# Altium PCB STM32Ethernet.PcbDoc
Units mm, origin at the board's own origin, x right, y up, seen from the top; angles counter-clockwise.
Board outline 45 x 65 mm, 2 copper layers (Top Layer, Bottom Layer), stack 1.646 mm thick; 65 components, 62 nets, 409 pads, 87 vias.
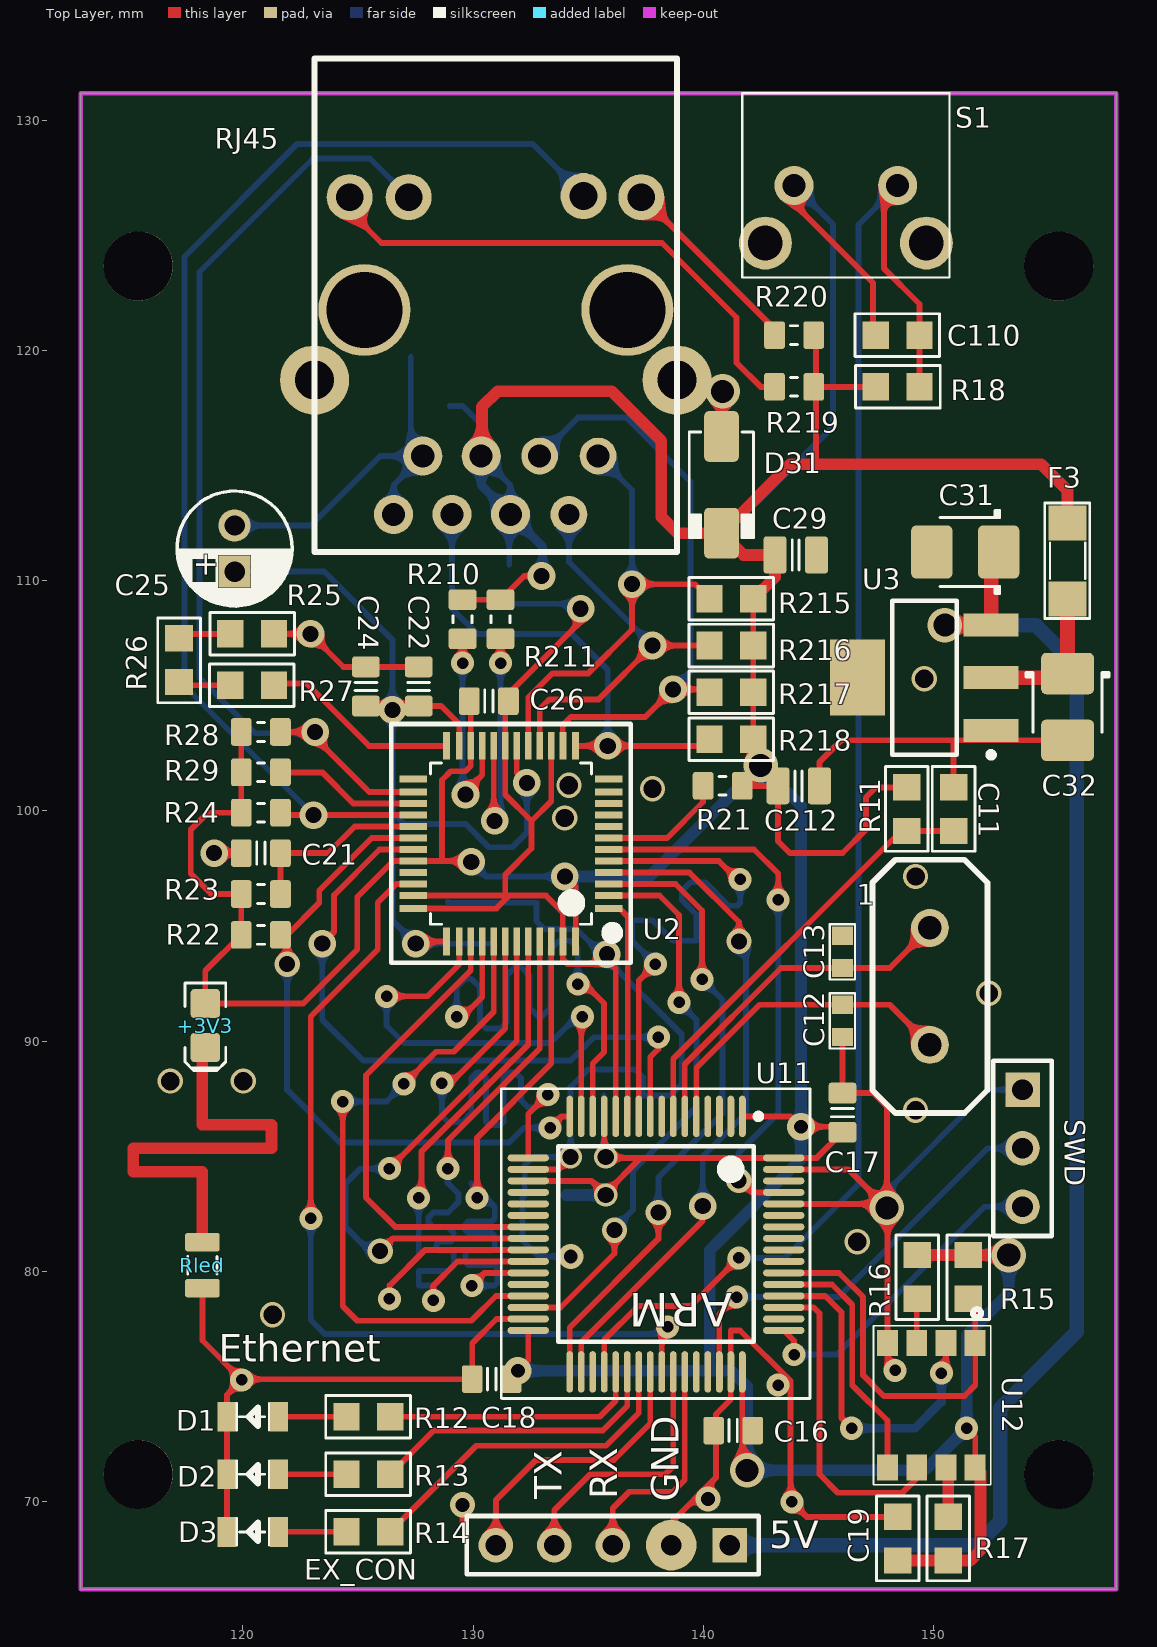
[diagram p0: Top Layer view]
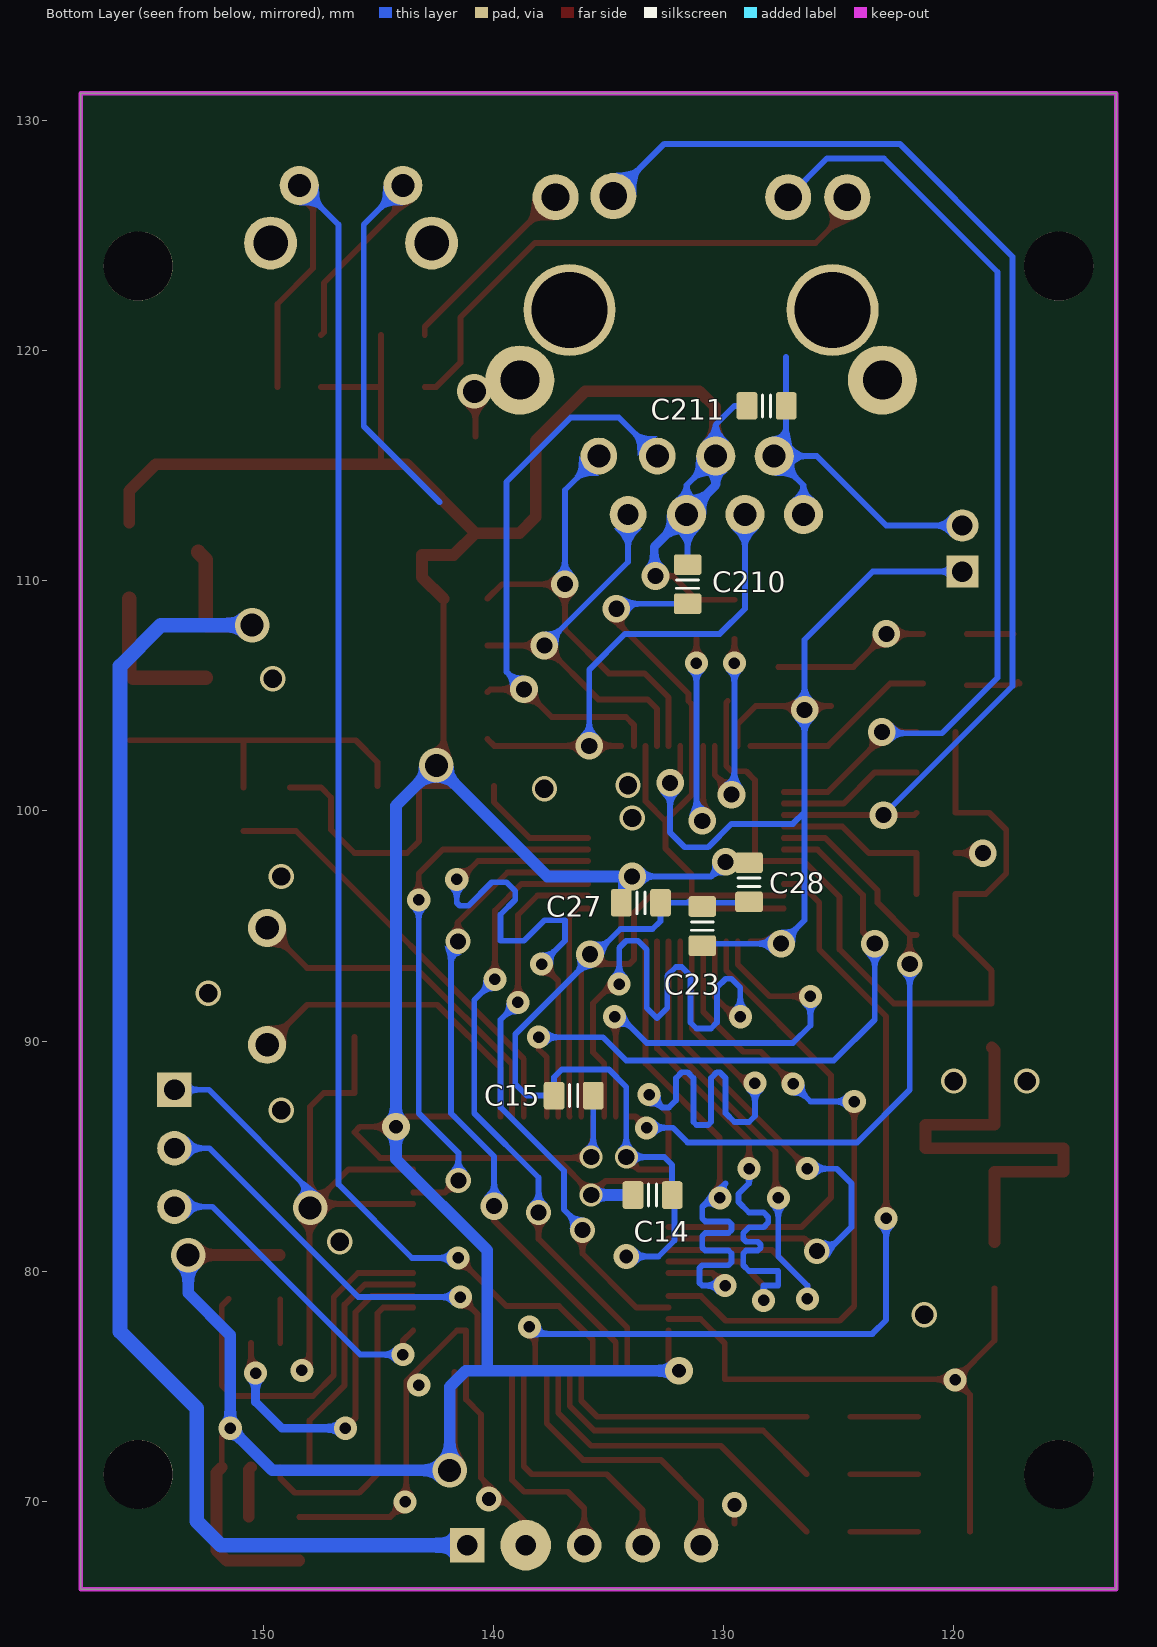
[diagram p1: Bottom Layer view, seen from below]
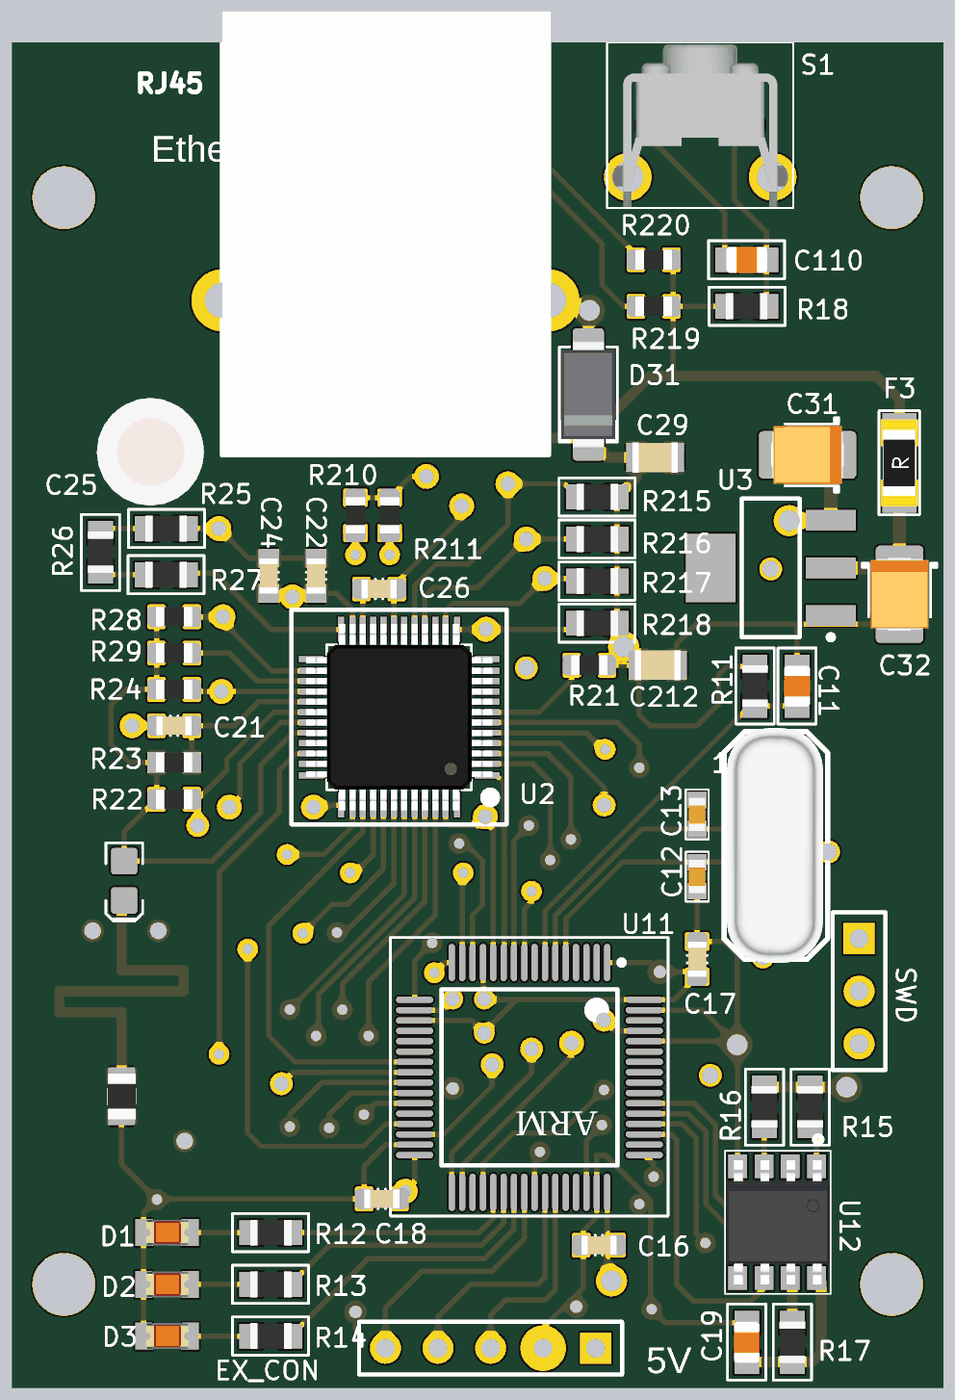
[diagram p2: 3D render of the assembled board from above, using the file's embedded part models]
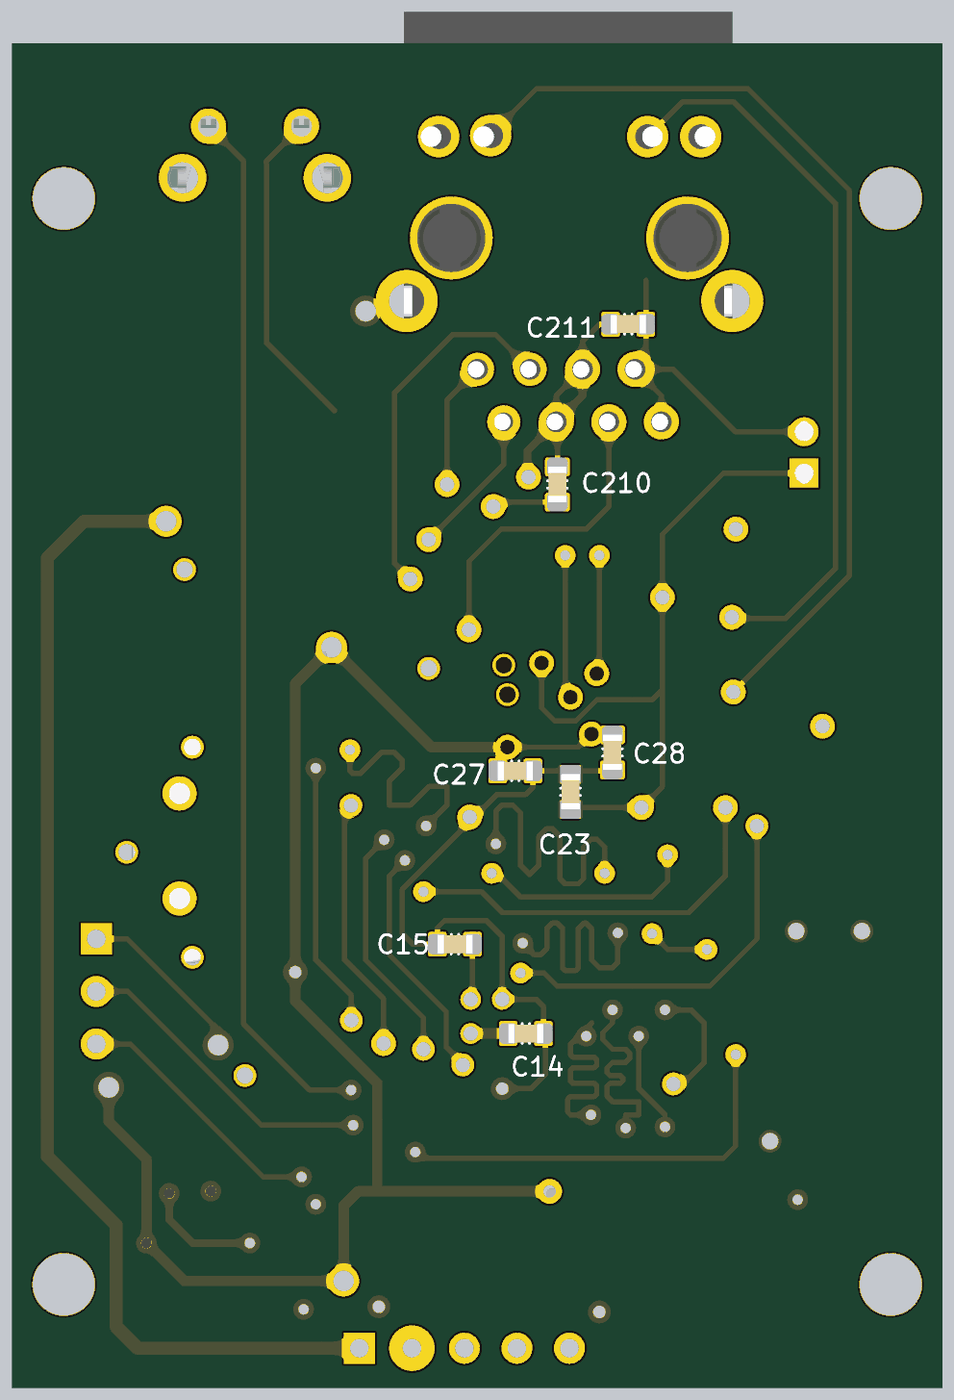
[diagram p3: 3D render of the assembled board from below, using the file's embedded part models]

## Layer stack, top to bottom
Top Solder: solder mask 0.0102, Solder Resist, Dk 3.5
Top Layer: signal copper 0.0356
Dielectric 1: dielectric 1.5748, FR-4, Dk 4.8
Bottom Layer: signal copper 0.0356
Bottom Solder: solder mask 0.0102, Solder Resist, Dk 3.5

## Board outline
112.947,66.179 112.947,131.179 157.947,131.179 157.947,66.179

## Design rules (kind name [scope] priority, off if disabled: settings)
Clearance [All] p1: gap=0.254
Length [InNetClass('ETH_SIGN')] p1: maxlimit=33 minlimit=27
PlaneConnect [All] p1: planeconnectstyle=Relief reliefexpansion=0.508 reliefentries=4 reliefconductorwidth=0.635 reliefairgap=0.254
PolygonConnect PAD_GND [(InPadClass('All Pads') AND InNet('GND'))] p1: connectstyle=Relief reliefconductorwidth=0.635 reliefentries=4 polygonreliefangle="90 Angle" airgapwidth=0.254
PolygonConnect [All] p2: connectstyle=Direct reliefconductorwidth=0.254 reliefentries=4 polygonreliefangle="90 Angle" airgapwidth=0.254
RoutingVias [All] p1: holewidth=0.7 width=1.2 viastyle="Through Hole" minholewidth=0.5 minwidth=1 maxholewidth=5 maxwidth=5
SolderMaskExpansion [All] p1: expansion=0.102
Width [All] p1: maxlimit=2.54 minlimit=0.254 preferedwidth=0.254
29 further rules are at their usual default settings.

## Classes and differential pairs
net class ETH_SIGN: MII_COL MII_CRS_WKUP MII_MDC MII_MDIO MII_RX_ER MII_RXD0 MII_RXD1 MII_RXD2 MII_RXD3 MII_TX_CLK MII_TX_EN MII_TXD0 MII_TXD1 MII_TXD2 MII_TXD3
net class SPI_DATA: STM_SPI_MISO STM_SPI_MOSI STM_SPI_SCK

## Components (designator, comment, footprint, x,y, rotation, side; value= is the part's Value field where it differs from the comment)
1 "CRY_25MHZ" cry 149.847,92.379 r270 top
+3V3 "Blue" LED-0805-K 118.364,90.678 r270 top
C11 "CAP_102_0603" CAP_0805_TOP 150.876,100.076 r90 top
C12 "CAP_18pF_0603" CAP_0603_TOP 146.047,90.879 r270 top
C13 "CAP_18pF_0603" CAP_0603_TOP 146.047,93.879 r90 top
C14 "CAP_104_0603" CAPC1608N_F#1 133.096,83.312 r180 bottom
C15 "CAP_104_0603" CAPC1608N_F#1 136.525,87.63 r0 bottom
C16 "CAP_104_0603" CAPC1608N_F#2 141.3,73.076 r180 top
C17 "CAP_104_0603" CAPC1608N_F#2 146.05,86.893 r90 top
C18 "CAP_104_0603" CAPC1608N_F#2 130.81,75.311 r180 top
C19 "CAP_104_0603" CAP_0805_TOP 148.447,68.379 r90 top
C21 "CAP_102_0603" CAPC1608N_F#2 120.777,98.171 r0 top
C22 "CAP_104_0603" CAPC1608N_F#3 127.635,105.41 r270 top
C23 "CAP_104_0603" CAPC1608N_F#4 130.937,94.996 r270 bottom
C24 "CAP_104_0603" CAPC1608N_F#3 125.343,105.41 r270 top
C25 "CAP_10uF/35V" CAP_10uF/35V 119.634,111.379 r90 top
C26 "CAP_104_0603" CAPC1608N_F#2 130.683,104.775 r180 top
C27 "CAP_104_0603" CAPC1608N_F#1 133.604,96.012 r180 bottom
C28 "CAP_104_0603" CAPC1608N_F#1 128.905,96.901 r90 bottom
C29 "CAP_104_0603" CAPC2012N_F 144.018,111.125 r0 top
C31 "330uF/25V" CAPMP3528X210N 151.384,111.252 r180 top
C32 "330uF/25V" CAPMP3528X210N 155.829,104.521 r270 top
C110 "CAP_102_0603" CAP_0805_TOP 148.447,120.679 r180 top
C210 "105" CAPC1608N_F#1 131.572,109.855 r270 bottom
C211 "105" CAPC1608N_F#1 128.143,117.602 r180 bottom
C212 "105" CAPC2012N_F 144.145,101.092 r0 top
D1 "LED_RED_0805" "LED 0805 TOP" 120.447,73.679 r0 top
D2 "LED_BLUE_0805" "LED 0805 TOP" 120.447,71.179 r0 top
D3 "LED_GREEN_0805" "LED 0805 TOP" 120.447,68.679 r0 top
D31 "Diode" DO-214AC 140.792,114.173 r270 top
EX_CON "EX_CON" HDR1X5 141.148,68.097 r180 top
F3 "fuse_200mA_1206" "SMD 1206" 155.829,110.871 r90 top
R11 "Res_4.7K_0805" RES_0805_TOP 148.844,100.076 r90 top
R12 "Res_330R_0805" RES_0805_TOP 125.447,73.679 r180 top
R13 "Res_330R_0805" RES_0805_TOP 125.447,71.179 r180 top
R14 "Res_330R_0805" RES_0805_TOP 125.447,68.679 r180 top
R15 "Res_4.7K_0805" RES_0805_TOP 151.511,79.756 r270 top
R16 "Res_4.7K_0805" RES_0805_TOP 149.301,79.756 r270 top
R17 "Res_4.7K_0805" RES_0805_TOP 150.647,68.379 r90 top
R18 "Res_4.7K_0805" RES_0805_TOP 148.447,118.429 r0 top
R21 "Res_2.2K_0805" RESC1608N_F#1 140.843,101.092 r0 top
R22 "Res_1.5K_0805" RESC1608N_F#1 120.777,94.615 r0 top
R23 "Res_4.7K_0805" RESC1608N_F#2 120.777,96.393 r180 top
R24 "Res_2.2K_0805" RESC1608N_F#1 120.777,99.925 r180 top
R25 "Res_47R_0805" RES_0805_TOP 120.396,107.696 r0 top
R26 "Res_120R_0805" RES_0805_TOP 117.221,106.553 r270 top
R27 "Res_4.7K_0805" RES_0805_TOP 120.396,105.465 r180 top
R28 "Res_0R_0603" RESC1608N_F#1 120.777,103.434 r0 top
R29 "Res_0R_0603" RESC1608N_F#1 120.777,101.68 r180 top
R210 "2k2" RESC1608N_F#1 129.54,108.331 r90 top
R211 "2k2" RESC1608N_F#1 131.191,108.331 r90 top
R215 "Res_49.9R_0805" RES_0805_TOP 141.224,109.22 r180 top
R216 "Res_49.9R_0805" RES_0805_TOP 141.224,107.188 r180 top
R217 "Res_49.9R_0805" RES_0805_TOP 141.224,105.156 r180 top
R218 "Res_49.9R_0805" RES_0805_TOP 141.224,103.124 r180 top
R219 "220R" RESC1608N_F#1 143.947,118.429 r180 top
R220 "220R" RESC1608N_F#1 143.947,120.679 r180 top
RJ45 "HR911105A" HR911105A 123.063,110.998 r0 top
Rled "Res_0805_1k" RESC2012N_F 118.237,80.264 r270 top
S1 "BUTTON 2P" "Nut nhan 2 chan  dung" 146.447,127.179 r0 top
SWD "Header 3" HDR1X3 153.873,87.884 r270 top
U2 "DP83848CVV" LQFP48 131.647,98.579 r180 top locked
U3 "AS1117-3V3" SOT223-4N 149.606,105.791 r180 top
U11 "STM32F107" LQFP64_N 137.947,81.179 r270 top locked
U12 "S25FL204K" SOIC_8 149.947,74.179 r270 top

## Footprints (in the part's own frame and the unit in brackets; to place one, negate y for a bottom-side part, rotate by r counter-clockwise, add the part's x,y. Pads: shape width x height; smd on the part's side, far side on the other; paste and mask are expansions set on the pad)
CAP_10uF/35V [mm]
  rect 1.4x1.4 hole 0.889: 1(-0.975,0)
  round 1.397 hole 0.889: 2(1.025,0)
  silkscreen extent -2.47,-2.5 2.52,2.5, body extent -2.58,-2.57 2.63,2.58, height 0.76
CAP_0603_TOP [mm]
  rect 0.8x0.9 smd: 1(-0.7,0) 2(0.7,0)
  silkscreen extent -1.2,-0.55 1.2,0.55, body extent -0.8,-0.4 0.8,0.4, height 0.7
CAP_0805_TOP [mm]
  rect 1.14x1.2 smd: 1(-0.95,0) 2(0.95,0)
  silkscreen extent -1.83,-0.92 1.85,0.93, body extent -1,-0.62 1,0.63, height 0.8
CAPC1608N_F#1 [mm] "Chip Capacitor, Body 1.6x0.8mm, 0603, IPC Medium Density, for Flex circuits"
  round 0.254 on Mech14: 0(0,0)
  rrect50% 1.1x1 on Bottom Solder: 1(-0.85,0) 1(0.85,0)
  rrect25% 0.9x1.2 smd paste-1: 1(-0.85,0) 2(0.85,0)
  rrect50% 0.9x1 on Bottom Paste: 1(-0.85,0) 1(0.85,0)
  Top Layer pour cut-out: -0.4,0.6 0.4,0.6 0.4,-0.6 -0.4,-0.6
  silkscreen extent -0.18,-0.48 0.18,0.48, body extent -0.85,-0.45 0.85,0.45, height 0.89
CAPC1608N_F#2 [mm] "Chip Capacitor, Body 1.6x0.8mm, 0603, IPC Medium Density, for Flex circuits"
  round 0.254 on Mech14: 0(0,0)
  rrect50% 1.1x1 on Top Solder: 1(-0.85,0) 1(0.85,0)
  rrect25% 0.9x1.2 smd paste-1: 1(-0.85,0) 2(0.85,0)
  rrect50% 0.9x1 on Top Paste: 1(-0.85,0) 1(0.85,0)
  Top Layer pour cut-out: -0.4,0.6 0.4,0.6 0.4,-0.6 -0.4,-0.6
  silkscreen extent -0.18,-0.48 0.18,0.48, body extent -0.85,-0.45 0.85,0.45, height 0.89
CAPC1608N_F#3 [mm] "Chip Capacitor, Body 1.6x0.8mm, 0603, IPC Medium Density, for Flex circuits"
  round 0.254 on Mech14: 0(0,0)
  rrect25% 1.1x1 on Top Solder: 1(-0.85,0) 1(0.85,0)
  rrect25% 0.9x1.2 smd paste-1: 1(-0.85,0) 2(0.85,0)
  rrect25% 0.9x1 on Top Paste: 1(-0.85,0) 1(0.85,0)
  Top Layer pour cut-out: -0.4,0.6 0.4,0.6 0.4,-0.6 -0.4,-0.6
  silkscreen extent -0.18,-0.48 0.18,0.48, body extent -0.85,-0.45 0.85,0.45, height 0.89
CAPC1608N_F#4 [mm] "Chip Capacitor, Body 1.6x0.8mm, 0603, IPC Medium Density, for Flex circuits"
  round 0.254 on Mech14: 0(0,0)
  rrect25% 1.1x1 on Bottom Solder: 1(-0.85,0) 1(0.85,0)
  rrect25% 0.9x1.2 smd paste-1: 1(-0.85,0) 2(0.85,0)
  rrect25% 0.9x1 on Bottom Paste: 1(-0.85,0) 1(0.85,0)
  Top Layer pour cut-out: -0.4,0.6 0.4,0.6 0.4,-0.6 -0.4,-0.6
  silkscreen extent -0.18,-0.48 0.18,0.48, body extent -0.85,-0.45 0.85,0.45, height 0.89
CAPC2012N_F [mm] "Chip Capacitor, Body 2.0x1.2mm, 0805, IPC Medium Density, for Flex circuits"
  round 0.254 on Mech14: 0(0,0)
  rrect25% 1.2x1.4 on Top Solder: 1(-0.9,0) 1(0.9,0)
  rrect25% 1x1.6 smd paste-1: 1(-0.9,0) 2(0.9,0)
  rrect25% 1x1.4 on Top Paste: 1(-0.9,0) 1(0.9,0)
  Top Layer pour cut-out: -0.4,0.8 0.4,0.8 0.4,-0.8 -0.4,-0.8
  silkscreen extent -0.15,-0.65 0.15,0.65, body extent -1.1,-0.72 1.1,0.73, height 1.34
CAPMP3528X210N [mm] "Molded body capacitor, Body 3.5x2.8mm, 1210, IPC Nominal settings"
  round 0.254 on Mech14: 0(0,0)
  rrect25% 1.8x2.3 smd: 1(-1.45,0) 2(1.45,0)
  Top Layer pour cut-out: -0.508,1.27 0.508,1.27 0.508,-1.27 -0.508,-1.27
  silkscreen extent -1.5,-1.8 1.1,1.8, body extent -1.75,-1.4 1.75,1.4, height 2.1
cry [mil]
  round 65 hole 40: 1(-100,0) 2(100,0)
  silkscreen extent -217,-98 217,98, body extent -223,-93 223,90, height 146
DO-214AC [mm] "JEDEC DO214 variation AC. SMA"
  round 0.508 on Mech14: 0(0,0)
  rrect25% 2.2x1.5 smd: A(-2.1,0) K(2.1,0)
  silkscreen extent -2.3,-1.4 2.3,1.4, body extent -2.6,-1.3 2.6,1.3, height 2.42
HDR1X3 [mm] "Connector; Header; 3 Position"
  rect 1.5x1.5 hole 0.9: 1(0,0)
  round 1.5 hole 0.9: 2(2.54,0) 3(5.08,0)
  silkscreen extent -1.27,-1.27 6.35,1.27, body extent -1.27,-1.27 6.35,1.27, height 7
HDR1X5 [mm] "Connector; Header; 5 Position"
  rect 1.5x1.5 hole 0.9: 1(0,0)
  round 2.2 hole 0.9: 2(2.54,0)
  round 1.5 hole 0.9: 3(5.08,0) 4(7.62,0) 5(10.16,0)
  silkscreen extent -1.27,-1.27 11.43,1.27
HR911105A [mm] "HanRun HR911105A"
  round 1.6 hole 1: 1(12.369,4.425) 3(9.829,4.425)
  round 1.6 hole 0.9: 2(11.099,1.885)
  round 1.7 hole 1: 4(8.559,1.885) 5(7.289,4.425) 6(6.019,1.885) 7(4.749,4.425) 8(3.479,1.885)
  round 2 hole 1.2: 9(14.249,15.675) 10(11.735,15.723) 11(4.139,15.675) 12(1.575,15.672)
  round 3 hole 1.7: G(0.049,7.725) G(15.799,7.725)
  round 4 hole 3.3: H(2.209,10.775) H(13.639,10.775)
  silkscreen extent 0.05,0.25 15.8,21.69, body extent 0.05,0.29 15.93,21.69, height 13.51
"LED 0805 TOP" [mm]
  rect 0.8x1.3 smd: 1(1.118,0) 2(-1.143,0)
  silkscreen extent -0.71,-0.58 0.69,0.58, body extent -1.01,-0.62 1.01,0.63, height 1.1
LED-0805-K [mil]
  round 20 on Mech14: 0(0,0)
  rrect25% 50x50 smd: A(-37.5,0) K(37.5,0)
  Top Layer pour cut-out: -15,30 15,30 15,-30 -15,-30
  silkscreen extent -72,-35 77,35, body extent -39,-25 39,25, height 31
LQFP48 [mm] "Thin QFP, 48-Leads, Body 7x7mm, Pitch 0.5mm, IPC Medium Density"
  rect 1.2x0.3 smd paste+0 mask+0.07: 1(-4.25,2.81) 2(-4.25,2.25) 3(-4.25,1.75) 4(-4.25,1.25) 5(-4.25,0.75) 6(-4.25,0.25) 7(-4.25,-0.25) 8(-4.25,-0.75) 9(-4.25,-1.25) 10(-4.25,-1.75) 11(-4.25,-2.25) 12(-4.25,-2.81) 25(4.25,-2.81) 26(4.25,-2.25) 27(4.25,-1.75) 28(4.25,-1.25) 29(4.25,-0.75) 30(4.25,-0.25) 31(4.25,0.25) 32(4.25,0.75) 33(4.25,1.25) 34(4.25,1.75) 35(4.25,2.25) 36(4.25,2.81)
  rect 0.3x1.2 smd paste+0 mask+0.07: 13(-2.81,-4.25) 14(-2.25,-4.25) 15(-1.75,-4.25) 16(-1.25,-4.25) 17(-0.75,-4.25) 18(-0.25,-4.25) 19(0.25,-4.25) 20(0.75,-4.25) 21(1.25,-4.25) 22(1.75,-4.25) 23(2.25,-4.25) 24(2.81,-4.25) 37(2.81,4.25) 38(2.25,4.25) 39(1.75,4.25) 40(1.25,4.25) 41(0.75,4.25) 42(0.25,4.25) 43(-0.25,4.25) 44(-0.75,4.25) 45(-1.25,4.25) 46(-1.75,4.25) 47(-2.25,4.25) 48(-2.81,4.25)
  silkscreen extent -5.2,-5.2 5.2,5.18, body extent -4.5,-4.5 4.5,4.5, height 1.5
LQFP64_N [mm] "Thin QFP, 64-Leads, Body 10x10mm, Pitch 0.5mm, IPC Medium Density"
  oval 1.8x0.3 smd: 1(-5.55,3.75) 2(-5.55,3.25) 3(-5.55,2.75) 4(-5.55,2.25) 5(-5.55,1.75) 6(-5.55,1.25) 7(-5.55,0.75) 8(-5.55,0.25) 9(-5.55,-0.25) 10(-5.55,-0.75) 11(-5.55,-1.25) 12(-5.55,-1.75) 13(-5.55,-2.25) 14(-5.55,-2.75) 15(-5.55,-3.25) 16(-5.55,-3.75) 33(5.55,-3.75) 34(5.55,-3.25) 35(5.55,-2.75) 36(5.55,-2.25) 37(5.55,-1.75) 38(5.55,-1.25) 39(5.55,-0.75) 40(5.55,-0.25) 41(5.55,0.25) 42(5.55,0.75) 43(5.55,1.25) 44(5.55,1.75) 45(5.55,2.25) 46(5.55,2.75) 47(5.55,3.25) 48(5.55,3.75)
  oval 0.3x1.8 smd: 17(-3.75,-5.55) 18(-3.25,-5.55) 19(-2.75,-5.55) 20(-2.25,-5.55) 21(-1.75,-5.55) 22(-1.25,-5.55) 23(-0.75,-5.55) 24(-0.25,-5.55) 25(0.25,-5.55) 26(0.75,-5.55) 27(1.25,-5.55) 28(1.75,-5.55) 29(2.25,-5.55) 30(2.75,-5.55) 31(3.25,-5.55) 32(3.75,-5.55) 49(3.75,5.55) 50(3.25,5.55) 51(2.75,5.55) 52(2.25,5.55) 53(1.75,5.55) 54(1.25,5.55) 55(0.75,5.55) 56(0.25,5.55) 57(-0.25,5.55) 58(-0.75,5.55) 59(-1.25,5.55) 60(-1.75,5.55) 61(-2.25,5.55) 62(-2.75,5.55) 63(-3.25,5.55) 64(-3.75,5.55)
  silkscreen extent -5.67,-4.25 4.25,4.58, body extent -5,-5 5,5, height 1.6
"Nut nhan 2 chan  dung" [mm]
  round 1.7 hole 1: 1(2,0) 2(-2.5,0)
  round 2.3 hole 1.5: 3(-3.75,-2.5) 4(3.25,-2.5)
  silkscreen extent -4.75,-4 4.25,4, body extent -4.55,-3.95 4.05,3.9, height 7.8
RES_0805_TOP [mm]
  rect 1.14x1.2 smd: 1(-0.95,0) 2(0.95,0)
  silkscreen extent -1.83,-0.92 1.85,0.93, body extent -1,-0.62 1,0.62, height 0.5
RESC1608N_F#1 [mm] "Chip Resistor, Body 1.6x0.8mm, 0603, IPC Medium Density, for Flex circuits"
  round 0.254 on Mech14: 0(0,0)
  rrect50% 1.1x1 on Top Solder: 1(-0.85,0) 1(0.85,0)
  rrect25% 0.9x1.2 smd paste-1: 1(-0.85,0) 2(0.85,0)
  rrect50% 0.9x1 on Top Paste: 1(-0.85,0) 1(0.85,0)
  Top Layer pour cut-out: -0.4,0.6 0.4,0.6 0.4,-0.6 -0.4,-0.6
  silkscreen extent -0.15,-0.41 0.15,0.41, body extent -0.87,-0.47 0.88,0.48, height 0.54
RESC1608N_F#2 [mm] "Chip Resistor, Body 1.6x0.8mm, 0603, IPC Medium Density, for Flex circuits"
  round 0.254 on Mech14: 0(0,0)
  rrect25% 1.1x1 on Top Solder: 1(-0.85,0) 1(0.85,0)
  rrect25% 0.9x1.2 smd paste-1: 1(-0.85,0) 2(0.85,0)
  rrect25% 0.9x1 on Top Paste: 1(-0.85,0) 1(0.85,0)
  Top Layer pour cut-out: -0.4,0.6 0.4,0.6 0.4,-0.6 -0.4,-0.6
  silkscreen extent -0.15,-0.41 0.15,0.41, body extent -0.87,-0.47 0.88,0.48, height 0.54
RESC2012N_F [mm] "Chip Resistor, Body 2.0x1.2mm, 0805, IPC Medium Density"
  round 0.254 on Mech14: 0(0,0)
  rrect25% 1x1.3 on Top Solder: 1(-1,0) 1(1,0)
  rrect25% 0.8x1.5 smd paste-1: 1(-1,0) 2(1,0)
  rrect25% 0.8x1.3 on Top Paste: 1(-1,0) 1(1,0)
  Top Layer pour cut-out: -0.6,0.75 0.6,0.75 0.6,-0.75 -0.6,-0.75
  silkscreen extent -0.38,-0.64 0.38,0.64, body extent -1.1,-0.67 1.1,0.68, height 0.69
"SMD 1206" [mil]
  rect 60x65 smd: 1(-65,0) 2(65,0)
  silkscreen extent -99,-38 99,39, body extent -83,-35 83,36, height 25
SOIC_8 [mm]
  rect 1.14x0.91 smd: 1(-2.7,1.87) 2(-2.7,0.6) 3(-2.7,-0.67) 4(-2.7,-1.94) 5(2.7,-1.94) 6(2.7,-0.67) 7(2.7,0.6) 8(2.7,1.87)
  silkscreen extent -4.17,-2.55 3.45,2.55, body extent -3,-2.5 3.01,2.5, height 1.75
SOT223-4N [mm]
  rect 2.4x1 smd: 1(-2.9,2.3) 2(-2.9,0) 3(-2.9,-2.3)
  rect 2.4x3.3 smd: 4(2.9,0)
  silkscreen extent -3.03,-3.35 1.4,3.47, body extent -1.85,-3.35 1.85,3.35, height 1.8

## Part data
1: library part cry, "Crystal Oscillator"
+3V3: library part LED_SMD_Blue_0805_100mcd, "LED 0805 SMD Blue 100mcd 470nm"
C11 C12 C13 C14 C15 C16 C17 C18 C19 C21 C22 C23 C24 C26 C27 C28 C29 C110 C210 C211 C212: library part "Cap 1206 BUT", "Capacitor"
C25: library part "CAP P"
C31 C32: library part CP4, "Cap 1000uF/16V - 220uF/50V"
D1 D2 D3: library part "LED 0805 TOP", "Typical INFRARED GaAs LED"
EX_CON: library part "Header 5", "Header, 5-Pin"
F3: library part "Fuse Thermal", "Thermal Fuse"
R11 R12 R13 R14 R15 R16 R17 R18 R21 R22 R23 R24 R25 R26 R27 R28 R29 R215 R216 R217 R218 R219 R220: library part Res, "Resistor"
R210 R211 Rled: library part Res
RJ45: library part RJ45-LED
S1: "Switch"
SWD: "Header, 3-Pin"
U3: library part AS1117
U11: library part STM32F103RBT6, "STM32 ARM-based 32-bit MCU with 128 Kbytes Flash, 64-pin LQFP, Industrial Temperature"

## Free pads (board coordinates)
  round 3 hole 3: GND(115.447,71.179) GND(115.447,123.679) GND(155.447,71.179) GND(155.447,123.679)

## Via types
v1: diameter 1, hole 0.5, Top Layer to Bottom Layer, tented both sides, 25 vias
v2: diameter 1.2, hole 0.7, Top Layer to Bottom Layer, 20 vias
v3: diameter 1, hole 0.5, Top Layer to Bottom Layer, 11 vias
v4: diameter 1.1, hole 0.8, Top Layer to Bottom Layer, 8 vias
v5: diameter 1.1, hole 0.7, Top Layer to Bottom Layer, 6 vias
v6: diameter 1.1, hole 0.8, Top Layer to Bottom Layer, tented both sides, 3 vias
v7: diameter 1.5, hole 1, Top Layer to Bottom Layer, 3 vias
v8: diameter 1.5, hole 1, Top Layer to Bottom Layer, tented both sides, 3 vias
v9: diameter 1.1, hole 0.6, Top Layer to Bottom Layer, tented both sides, 3 vias
v10: diameter 1, hole 0.7, Top Layer to Bottom Layer, 3 vias
v11: diameter 1.2, hole 0.6, Top Layer to Bottom Layer, 1 vias
v12: diameter 1.2, hole 0.6, Top Layer to Bottom Layer, tented both sides, 1 vias

## Nets (pads, with @x,y where several pads share a name; then routed paths per layer and width w, separated by ;. In a path a pad name is that pad's centre, name@x,y a point inside that pad or via, vN(x,y) a via of type N, cw(c..) or ccw(c..) an arc to the next point about the centre after c; other vN are vias at no path point)
3.3V: +3V3.A C14.1@133.946,83.312 C15.1@135.675,87.63 C16.1@142.15,73.076 C17.1@146.05,86.043 C18.1@131.66,75.311 C19.1 C26.2 C27.1@134.454,96.012 C28.2 C29.1@143.118,111.125 C210.1@131.572,110.705 C211.1@128.993,117.602 C212.1@143.245,101.092 D31.K F3.2 R11.2 R15.1 R16.1 R17.1 R18.1 R21.2 R22.1@119.927,94.615 R23.2 R24.2 R28.1@119.927,103.434 R29.2 R210.2 R211.2 R215.1 R216.1 R217.1 R218.1 R219.1@144.797,118.429 R220.1@144.797,120.679 RJ45.4 RJ45.5 U2.22 U2.32 U2.48 U11.1 U11.13 U11.19 U11.32 U11.48 U11.64 U12.8 | length 253.5
  Top Layer w0.254: R28.1@119.927,103.434 R24.2 118.467,99.925 117.729,99.187 117.729,97.282 118.618,96.393 R23.2 119.927,94.615 118.364,93.052 +3V3.A 122.618,91.63 124.968,93.98 124.968,96.266 126.531,97.829 U2.32 128.651,97.829 ; R210.2 R211.2 132.221,110.211 v2(132.969,110.211) ; C26.2 129.897,104.711 U2.22 129.897,101.957 129.667,101.727 129.032,101.727 128.651,101.346 128.651,97.829 ; v2(129.921,97.79) 129.882,97.829 128.651,97.829 ; RJ45.4@131.654,112.604 RJ45.4@131.654,112.902 ; v11(131.947,75.679) 132.397,76.129 U11.32 ; U11.19 135.146,83.929 v10(135.763,83.312) 135.763,83.405 137.287,84.929 ; v2(133.985,97.155) 134.457,96.683 U2.48 ; U11.13 135.697,85.029 v10(135.763,84.963) 135.797,84.929 137.287,84.929 ; R21.2 143.245,101.092 143.245,98.69 143.764,98.171 146.05,98.171 147.066,99.187 147.066,100.584 147.508,101.026 R11.2 ; U11.48 141.697,71.561 v7(141.91,71.349) ; U11.1 143.797,86.729 v12(144.247,86.279) 145.814,86.279 146.05,86.043 144.936,84.929 U11.64 137.287,84.929 ; 142.174,101.158 v7@142.174,101.981 ; R215.1 R216.1 R217.1 R218.1 142.174,102.301 v7(142.494,101.981) ; R220.1@144.897,120.679 R219.1@144.897,118.429 ; 144.932,115.062 144.897,115.097 R219.1@144.897,118.429 ; R18.1 R219.1@144.897,118.429 ; v1(151.447,73.179) 151.817,72.809 U12.8
  Top Layer w0.508: RJ45.5@130.384,115.442 130.384,117.557 131.064,118.237 136.017,118.237 138.176,116.078 138.176,112.776 138.879,112.073 D31.K ; R215.1 143.118,110.164 143.118,111.125 141.74,111.125 D31.K ; C19.1 R17.1 151.597,67.429 152.047,67.879 152.047,71.249 U12.8 ; R16.1 R15.1 v8(153.274,80.706) ; F3.2 155.829,113.919 154.686,115.062 144.932,115.062 143.781,115.062 D31.K
  Bottom Layer w0.254: C211.1@128.993,117.602 129.54,117.602 130.352,116.79 RJ45.5 ; v2(129.921,97.79) 130.556,97.155 v2(133.985,97.155) ; RJ45.5@130.384,115.39 131.622,114.153 RJ45.4 131.572,112.833 C210.1@131.572,110.705 ; v2(132.969,110.211) v2@133.02,110.16 ; C27.1@134.454,96.012 134.454,96.989 134.62,97.155 ; C15.1@135.675,87.63 135.675,85.051 v10(135.763,84.963)
  Bottom Layer w0.381: RJ45.5 130.352,114.153 RJ45.4 133.02,111.485 v2@133.02,110.16
  Bottom Layer w0.508: RJ45.5@130.384,115.39 RJ45.5@130.384,115.442 ; v11(131.947,75.679) 140.31,75.679 ; C14.1@134.046,83.312 135.636,83.312 v10(135.763,83.312) ; 134.62,97.155 137.668,97.155 v7(142.494,101.981) 144.247,100.228 v12(144.247,86.279) 144.247,84.879 140.284,80.916 140.284,75.704 140.31,75.679 ; v8(153.274,80.706) 153.274,79.055 151.447,77.228 v1(151.447,73.179) 149.617,71.349 v7(141.91,71.349) 141.91,74.981 141.212,75.679 140.31,75.679
25M_OUT: U2.25
+3V3: C32.1 F3.1 U3.2 | length 6.4
  Top Layer w0.635: U3.2 C32.1@155.649,105.791 ; C32.1 F3.1
+5V: C31.1 EX_CON.1 U3.3 | length 62.5
  Top Layer w0.635: v7(150.495,108.077) 152.492,108.077 U3.3 152.506,110.924 C31.1
  Bottom Layer w0.635: EX_CON.1 151.867,68.097 152.908,69.139 152.908,74.041 156.235,77.368 156.235,106.299 154.457,108.077 v7(150.495,108.077)
ETH_MCO: U2.34 U11.41 | length 39.2
  Top Layer w0.254: v3(122.947,82.296) 122.947,91.07 125.857,93.98 125.857,96.019 126.454,96.616 126.454,96.621 126.662,96.829 U2.34 ; U11.41 138.197,77.329 v1(138.447,77.579)
  Bottom Layer w0.254: v3(122.947,82.296) 122.947,77.879 123.547,77.279 138.147,77.279 v1(138.447,77.579)
GND: C11.2 C12.2 C13.2 C14.2 C15.2 C16.2 C17.2 C18.2 C19.2 C21.1@119.927,98.171 C22.1@127.635,106.26 C23.1@130.937,95.846 C24.1@125.343,106.26 C25.2 C26.1@131.533,104.775 C27.2 C28.1@128.905,96.051 C29.2 C31.2 C32.2 C110.2 C210.2 C211.2 C212.2 D1.2 D2.2 D3.2 D31.A EX_CON.2 pad.GND R25.2 RJ45.7 RJ45.8 RJ45.G Rled.2 S1.2 SWD.1 U2.15 U2.19 U2.35 U2.36 U2.47 U3.1 U11.12 U11.18 U11.31 U11.47 U11.60 U11.63 U12.4 | length 228.9
  Top Layer w0.254: Rled.2 118.237,76.989 v1(119.947,75.279) v1@119.979,75.311 ; v2(118.745,98.171) C21.1@119.927,98.171 ; D3.2 D2.2 D1.2 119.304,74.636 v1@119.979,75.311 ; R25.2 v2(122.936,107.696) 124.372,106.26 125.343,106.26 C22.1@127.635,106.26 ; U2.36 131.012,95.769 131.397,96.154 ; U2.35 131.397,96.329 ; 129.54,69.037 v9(129.54,69.85) ; U11.31 131.015,77.929 129.96,76.874 C18.2 v1@119.979,75.311 ; U11.18 133.705,84.429 v10(134.239,84.963) ; U2.15 133.397,100.425 132.54,99.568 ; v2(134.671,108.788) 134.671,108.229 131.533,105.092 131.533,104.775 131.397,104.639 U2.19 131.397,100.711 132.54,99.568 ; v2(135.814,93.777) 135.738,93.853 135.738,93.345 134.112,93.345 133.897,93.56 U2.47 133.897,95.592 133.16,96.329 131.572,96.329 131.397,96.154 ; v2@135.994,93.345 136.197,93.142 U11.12 ; EX_CON.2 138.608,69.088 140.547,71.027 140.547,73.779 141.197,74.429 U11.47 141.197,77.429 141.597,77.429 143.797,75.229 143.797,70.029 v1(143.847,69.979) 144.497,69.329 C19.2 ; D31.A 140.792,118.186 v8(140.843,118.237) ; U11.60 v8@147.805,82.929 ; U11.63@143.504,84.422 U11.63 146.305,84.429 v8@147.805,82.929 ; S1.2 143.947,126.379 147.377,122.949 147.377,120.799 C110.2 ; C212.2 145.045,102.119 145.997,103.071 150.913,103.071 ; C12.2 146.05,90.176 C17.2 147.384,87.743 147.98,87.147 v8(147.98,82.753) ; v1(148.336,75.692) 148.007,76.021 U12.4 148.007,82.727 v8(147.98,82.753) ; C11.2 150.876,103.034 150.913,103.071 ; C32.2 150.913,103.071 ; 131.397,96.154 131.397,96.329 ; 131.397,96.329 131.397,97.234 132.54,98.377 132.54,99.568 ; v8@147.805,82.929 v8(147.98,82.753)
  Bottom Layer w0.254: v2(118.745,98.171) v2@118.872,98.298 ; C25.2 122.945,112.404 125.964,115.423 RJ45.7 ; RJ45.8 126.542,114.153 RJ45.7 ; 127.293,119.724 C211.2 127.293,115.941 RJ45.7 ; C28.1@128.905,96.051 128.944,96.012 131.572,96.012 ; C23.1@131.533,96.051 131.572,96.012 ; C210.2 134.454,109.005 v2(134.671,108.788) ; C14.2@132.146,83.312 132.146,81.341 132.842,80.645 v9(134.239,80.645) ; C14.2 132.246,84.621 132.588,84.963 v10(134.239,84.963) 134.239,88.011 135.001,88.773 137.033,88.773 137.375,88.431 C15.2 138.557,87.63 139.065,88.138 139.065,90.297 v2@135.712,93.65 ; v2@135.7,93.662 134.493,94.869 133.096,94.869 132.754,95.211 C27.2 131.572,96.012 ; v2(135.814,93.777) v2@135.839,93.777 ; 142.347,113.416 145.644,116.713 145.644,125.382 145.647,125.385 145.647,125.479 S1.2 ; v8(147.98,82.753) 147.98,83.49 152.375,87.884 SWD.1
  other v1: 143.256,75.057
  other v4: 146.685,81.28 149.225,86.995 152.4,92.075 149.225,97.155 133.985,99.695 137.795,100.965 134.163,101.117 149.606,105.74
  other v6: 121.285,78.105 116.84,88.265 120.015,88.265
  other v9: 140.208,70.104
INT: R21.1@139.993,101.092 U2.7 | length 5.4
  Top Layer w0.254: U2.7 138.43,98.829 139.993,100.392 R21.1@139.993,101.092
LED_ACT: R28.2 RJ45.11 U2.26 | length 42.7
  Top Layer w0.254: R28.2 v2@122.88,103.434 ; v2(123.134,103.434) v2@122.88,103.434 ; U2.26 125.485,100.829 v2@122.88,103.434
  Bottom Layer w0.254: v2(123.134,103.434) 123.19,103.378 120.523,103.378 118.11,105.791 118.11,123.419 123.043,128.352 125.522,128.352 RJ45.11
LED_LINK: R24.1@121.627,99.925 RJ45.10 U2.28 | length 52.7
  Top Layer w0.254: R24.1@121.627,99.925 121.723,99.829 v2@123.063,99.829 ; v2(123.063,99.822) v2@123.063,99.829 ; U2.28 v2@123.063,99.829
  Bottom Layer w0.254: v2(123.063,99.822) 117.455,105.43 117.455,124.084 122.358,128.987 132.583,128.987 RJ45.10@134.83,126.74
LED_SPEED: R29.1@121.627,101.68 U2.27 | length 6.3
  Top Layer w0.254: R29.1@121.627,101.68 123.444,101.68 124.795,100.329 U2.27
MII_COL: U2.42 U11.17 | length 24.1
  Top Layer w0.254: v1(128.647,88.179) 129.025,88.179 131.397,90.551 U2.42 ; U11.17 132.397,86.829 v1(133.247,87.679)
  Bottom Layer w0.254: v1(128.647,88.179) 128.647,86.745 128.905,86.487 129.54,86.487 129.921,86.868 129.921,88.392 130.175,88.646 130.302,88.646 130.556,88.392 130.556,86.487 130.683,86.36 131.191,86.36 131.318,86.487 131.318,88.392 131.572,88.646 131.826,88.646 132.08,88.392 132.08,87.427 132.385,87.122 132.69,87.122 v1(133.247,87.679)
MII_CRS_WKUP: U2.40 U11.14 | length 27.6
  Top Layer w0.254: v3(129.286,91.059) 129.54,91.059 130.397,91.916 U2.40 ; v1(134.547,92.479) 134.851,92.479 135.687,91.643 135.687,89.517 135.197,89.027 U11.14
  Bottom Layer w0.254: v3(129.286,91.059) 129.286,92.329 129.667,92.71 129.921,92.71 130.302,92.329 130.302,90.805 130.556,90.551 131.191,90.551 131.445,90.805 131.445,92.837 131.826,93.218 132.08,93.218 132.461,92.837 132.461,91.44 132.905,90.995 133.35,91.44 133.35,93.98 133.731,94.361 134.239,94.361 134.547,94.053 v1(134.547,92.479)
MII_MDC: U2.31 U11.9 | length 29.2
  Top Layer w0.254: v2(123.444,94.234) 123.952,94.742 123.952,96.344 125.937,98.329 U2.31 ; U11.9 137.697,89.31 138.049,89.662 v3(138.049,90.17)
  Bottom Layer w0.254: v2(123.444,94.234) 123.444,90.932 125.222,89.154 134.239,89.154 135.255,90.17 v3(138.049,90.17)
MII_MDIO: R22.2 U2.30 U11.16 | length 28.3
  Top Layer w0.254: R22.2 R22.2@121.92,94.615 ; v5(121.92,93.345) R22.2@121.92,94.615 ; U2.30 125.597,98.829 123.317,96.549 123.317,96.012 R22.2@121.92,94.615 ; v3(133.35,86.233) 133.846,86.729 U11.16
  Bottom Layer w0.254: v5(121.92,93.345) 121.92,87.884 124.206,85.598 131.572,85.598 132.207,86.233 v3(133.35,86.233)
MII_RX_CLK: U2.38 U11.15 | length 19.6
  Top Layer w0.254: v3(126.238,91.948) 128.016,91.948 129.397,93.329 U2.38 ; U11.15 134.697,91.009 v3(134.747,91.059)
  Bottom Layer w0.254: v3(126.238,91.948) 126.238,90.678 127,89.916 133.35,89.916 134.493,91.059 v3(134.747,91.059)
MII_RX_DV: U2.39 U11.23 | length 20.6
  Top Layer w0.254: U2.39 129.897,93.067 125.349,88.519 125.349,83.199 126.619,81.929 U11.23
MII_RX_ER: U2.41 U11.29 | length 28.9
  Top Layer w0.254: v3(124.333,87.376) 124.333,78.486 124.968,77.851 129.919,77.851 130.997,78.929 U11.29 ; v3(126.994,88.138) 128.391,89.535 129.159,89.535 130.897,91.273 U2.41
  Bottom Layer w0.254: v3(124.333,87.376) 126.232,87.376 v3(126.994,88.138)
MII_RXD0: U2.43 U11.24 | length 24.8
  Top Layer w0.254: v5(125.959,80.874) 126.514,81.429 U11.24 ; v1(126.365,84.455) 126.365,84.476 131.897,90.008 U2.43
  Bottom Layer w0.254: v5(125.959,80.874) 125.501,80.874 124.46,81.915 124.46,83.82 125.095,84.455 v1(126.365,84.455)
MII_RXD1: U2.44 U11.25 | length 25.3
  Top Layer w0.254: v1(126.365,78.797) 126.365,79.375 127.919,80.929 U11.25 ; v1(127.635,83.185) 127.752,83.302 127.752,85.198 132.397,89.843 U2.44
  Bottom Layer w0.254: v1(126.365,78.797) 126.365,79.375 127.635,80.645 v1(127.635,83.185)
MII_RXD2: U2.45 U11.26 | length 27.6
  Top Layer w0.254: v1(128.27,78.74) 128.27,79.375 129.324,80.429 U11.26 ; v1(128.905,84.455) 128.905,85.687 132.897,89.679 U2.45
  Bottom Layer w0.254: v1(128.27,78.74) 128.27,79.375 127.635,79.375 127.635,80.01 128.905,80.01 129.159,80.264 129.159,80.772 129.032,80.899 128.524,80.899 128.397,81.026 128.397,81.153 128.524,81.28 129.032,81.28 129.159,81.407 129.159,81.661 128.905,81.915 128.27,81.915 128.067,82.118 128.067,82.347 128.27,82.55 128.905,82.55 129.37,83.015 129.37,83.355 128.905,83.82 v1(128.905,84.455)
MII_RXD3: U2.46 U11.27 | length 26.1
  Top Layer w0.254: v1(129.947,79.379) 130.497,79.929 U11.27 ; v1(130.175,83.185) 130.175,85.801 133.397,89.023 U2.46
  Bottom Layer w0.254: 129.921,83.82 v1@130.175,83.566 ; v1(129.947,79.379) 130.941,79.379 131.064,79.502 131.064,80.137 130.937,80.264 129.794,80.264 129.667,80.391 129.667,80.772 129.794,80.899 130.81,80.899 130.937,81.026 130.937,81.534 130.81,81.661 129.794,81.661 129.667,81.788 129.667,82.042 129.794,82.169 130.81,82.169 130.937,82.296 130.937,82.804 v1@130.175,83.566 ; v1(130.175,83.185) v1@130.175,83.566
MII_TX_CLK: U2.1 U11.11 | length 9.7
  Top Layer w0.254: U2.1 136.357,95.769 136.719,95.407 136.719,86.751 U11.11
MII_TX_EN: U2.2 U11.30 | length 24.6
  Top Layer w0.254: U11.30 133.801,78.429 136.144,80.772 v5(136.144,81.788) ; U2.2 138.097,96.329 138.947,95.479 v1(138.947,91.679)
  Bottom Layer w0.254: v5(136.144,81.788) 136.144,81.874 136.947,82.677 136.947,84.369 139.7,87.122 139.7,90.926 v1(138.947,91.679)
MII_TXD0: U2.3 U11.33 | length 27.7
  Top Layer w0.254: U11.33 134.197,77.555 138.049,81.407 v5(138.049,82.55) ; U2.3 138.797,96.829 139.947,95.679 v1(139.947,92.679)
  Bottom Layer w0.254: v5(138.049,82.55) 138.049,84.074 140.843,86.868 140.843,91.783 v1(139.947,92.679)
MII_TXD1: U2.4 U11.34 | length 29.2
  Top Layer w0.254: U11.34 134.697,76.912 139.979,82.194 v2(139.979,82.829) ; U2.4 139.397,97.329 141.554,95.172 v5(141.554,94.336)
  Bottom Layer w0.254: v2(139.979,82.829) 139.979,84.988 141.859,86.868 141.859,94.031 v5(141.554,94.336)
MII_TXD2: U2.5 U11.10 | length 25.3
  Top Layer w0.254: U2.5 140.677,97.829 141.478,97.028 v3(141.605,97.028) ; U11.10 137.197,92.62 v1(137.922,93.345)
  Bottom Layer w0.254: v1@138.176,93.345 v1(137.922,93.345) 136.906,94.361 136.906,95.25 137.795,95.25 138.684,94.361 139.7,94.361 139.7,95.504 139.065,96.139 139.065,96.52 139.446,96.901 140.081,96.901 141.097,95.885 141.478,95.885 141.605,96.012 v3(141.605,97.028)
MII_TXD3: U2.6 U11.61 | length 24
  Top Layer w0.254: U2.6 142.209,98.329 143.256,97.282 v1(143.256,96.139) ; v5@141.595,83.947 142.113,83.429 U11.61
  Bottom Layer w0.254: v5(141.536,83.947) 141.536,85.148 143.256,86.868 v1(143.256,96.139)
Net+3V3_K: +3V3.K Rled.1@118.237,81.264 | length 20.5
  Top Layer w0.508: Rled.1@118.237,81.264 118.237,83.82 118.237,84.328 115.237,84.328 115.237,85.344 118.237,85.344 121.237,85.344 121.237,86.36 118.237,86.36 118.237,86.995 118.237,89.599 +3V3.K
NetC11_1: C11.1 R11.1 U11.7 | length 18.8
  Top Layer w0.254: U11.7 138.697,89.229 148.594,99.126 R11.1 C11.1
NetD1_1: D1.1 R12.2 | length 2.9
  Top Layer w0.254: D1.1 R12.2
NetD2_1: D2.1 R13.2 | length 2.9
  Top Layer w0.254: D2.1 R13.2
NetD3_1: D3.1 R14.2 | length 2.9
  Top Layer w0.254: D3.1 R14.2
NetR16_2: R16.2 U12.3 | length 1.9
  Top Layer w0.254: U12.3 R16.2@149.277,78.782
NetR17_2: R17.2 U12.7 | length 2.2
  Top Layer w0.508: U12.7 150.647,71.379 R17.2
NetR25_1: R25.1 R26.1 | length 2
  Top Layer w0.254: R26.1@117.414,107.696 R25.1
NetR26_2: R26.2 R27.2 | length 2.3
  Top Layer w0.254: R26.2 117.359,105.465 R27.2
NetR27_1: R27.1 U2.24 | length 8.6
  Top Layer w0.254: R27.1@121.346,105.537 122.768,105.537 125.476,102.829 U2.24
NetR210_1: R210.1@129.54,107.481 U2.21 | length 9.2
  Top Layer w0.254: v3(129.54,106.426) R210.1@129.54,107.481 ; v2(129.667,100.711) 129.667,100.838 130.397,101.568 U2.21
  Bottom Layer w0.254: v3(129.54,106.426) 129.54,100.838 v2(129.667,100.711)
NetR211_1: R211.1@131.191,107.481 U2.20 | length 11.3
  Top Layer w0.254: U2.20 130.897,99.608 v2(130.937,99.568) ; v3(131.191,106.426) R211.1@131.191,107.481
  Bottom Layer w0.254: v2(130.937,99.568) 131.191,99.822 v3(131.191,106.426)
NetR219_2: R219.2 RJ45.12 | length 23.3
  Top Layer w0.254: RJ45.12@124.67,126.689 124.67,126.028 126.019,124.679 138.211,124.679 141.447,121.443 141.447,119.479 142.497,118.429 R219.2@142.997,118.429
NetR220_2: R220.2 RJ45.9 | length 8.4
  Top Layer w0.254: RJ45.9@137.344,126.692 142.997,121.039 R220.2@142.997,120.679
OSC_IN: 1.2 C12.1 U11.5 | length 14.1
  Top Layer w0.254: U11.5 139.697,88.829 142.447,91.579 C12.1 148.107,91.579 1.2
OSC_OUT: 1.1 C13.1 U11.6 | length 15.4
  Top Layer w0.254: U11.6 139.197,88.994 143.382,93.179 C13.1 148.107,93.179 1.1
PFB: C22.2 C23.2 C24.2 C25.1 U2.18 U2.23 U2.37 | length 42.6
  Top Layer w0.254: C24.2 C22.2 128.612,104.56 129.397,103.775 U2.23 ; v2(127.508,94.234) 127.603,94.329 U2.37 ; U2.18 131.897,101.656 v2(132.334,101.219)
  Bottom Layer w0.254: C25.1 123.53,110.404 126.492,107.442 v2(126.492,104.394) 126.492,99.949 ; C23.2 130.849,94.234 v2(127.508,94.234) 126.492,95.25 126.492,99.695 126.492,99.949 ; v2(132.334,101.219) 132.334,99.06 131.699,98.425 130.683,98.425 129.667,99.441 127,99.441 126.492,99.949
PHY_RESET: C21.2 R23.1@121.627,96.393 U2.29 | length 8
  Top Layer w0.254: R23.1@121.627,96.393 C21.2 123.698,98.171 124.856,99.329 U2.29
RD+: R217.2 RJ45.3 U2.14 | length 25.7
  Top Layer w0.254: U2.14 133.897,103.729 134.247,104.079 137.48,104.079 v2(138.684,105.283) 140.147,105.283 R217.2
  Bottom Layer w0.254: RJ45.3 134.563,117.094 136.652,117.094 139.446,114.3 139.446,106.045 v2(138.684,105.283)
RD-: R218.2 RJ45.6 U2.13 | length 21.2
  Top Layer w0.254: U2.13 v2(135.849,102.829) 139.979,102.829 R218.2
  Bottom Layer w0.254: RJ45.6 129.082,108.789 130.175,107.696 134.29,107.696 135.849,106.137 v2(135.849,102.829) ; RJ45.6@129.114,112.883 RJ45.6@129.114,112.902
STM_BUTTON: C110.1 R18.2 S1.1 U11.36 | length 69
  Top Layer w0.254: U11.36 135.697,77.023 137.16,78.486 139.446,78.486 141.539,80.579 v1(141.547,80.579) ; S1.1 147.847,126.579 147.847,123.579 149.397,122.029 C110.1 R18.2
  Bottom Layer w0.254: v1(141.547,80.579) 143.547,80.579 146.744,83.776 146.744,125.476 S1.1
STM_LED1: R12.1 U11.37 | length 11.3
  Top Layer w0.254: R12.1 135.505,73.679 136.197,74.371 U11.37
STM_LED2: R13.1 U11.38 | length 13
  Top Layer w0.254: R13.1 128.295,73.077 135.632,73.077 136.697,74.143 U11.38
STM_LED3: R14.1 U11.39 | length 14.7
  Top Layer w0.254: R14.1 130.133,72.415 135.775,72.415 137.197,73.838 U11.39
STM_LED4: EX_CON.5 U11.40 | length 12.3
  Top Layer w0.254: EX_CON.5 130.988,70.053 132.74,71.806 136.119,71.806 137.697,73.384 U11.40
STM_SPI_CS: R15.2 U11.54 U12.1 | length 16.6
  Top Layer w0.254: U11.54 145.897,79.929 146.947,78.879 146.947,75.479 147.847,74.579 151.347,74.579 151.817,75.049 U12.1 151.817,78.5 R15.2
STM_SPI_MISO: U11.52 U12.2 | length 15
  Top Layer w0.254: U11.52 145.297,78.929 146.007,78.219 146.007,73.619 v1(146.447,73.179) ; v1(150.347,75.579) 150.547,75.779 U12.2
  Bottom Layer w0.381: v1(146.447,73.179) 149.201,73.179 150.347,74.325 v1(150.347,75.579)
STM_SPI_MOSI: U11.53 U12.5 | length 11
  Top Layer w0.254: U11.53 145.597,79.429 146.477,78.549 146.477,75.049 148.007,73.519 U12.5
STM_SPI_SCK: U11.51 U12.6 | length 13.9
  Top Layer w0.254: U11.51 144.797,78.429 145.047,78.179 145.047,71.179 145.847,70.379 148.647,70.379 149.277,71.009 U12.6
STM_USART1_RX: EX_CON.3 U11.43 | length 9.9
  Top Layer w0.254: EX_CON.3 136.068,69.706 136.779,70.417 138.685,70.417 139.197,70.929 U11.43
STM_USART1_TX: EX_CON.4 U11.42 | length 11.6
  Top Layer w0.254: EX_CON.4 133.528,69.621 135.085,71.179 138.347,71.179 138.697,71.529 U11.42
SWCLK: SWD.3 U11.49 | length 13.8
  Top Layer w0.254: U11.49 143.947,76.979 v1(143.947,76.379)
  Bottom Layer w0.254: v1(143.947,76.379) 145.797,76.379 152.222,82.804 SWD.3
SWDIO: SWD.2 U11.46 | length 18.7
  Top Layer w0.254: U11.46 140.697,78.129 v1(141.447,78.879)
  Bottom Layer w0.254: v1(141.447,78.879) 145.884,78.879 152.349,85.344 SWD.2
TD+: R215.2 RJ45.1 U2.17 | length 19.6
  Top Layer w0.254: U2.17 132.397,104.929 133.447,105.979 135.001,105.979 136.906,107.884 v2(136.906,109.855) 139.639,109.855 R215.2
  Bottom Layer w0.254: RJ45.1 136.906,113.948 v2(136.906,109.855)
TD-: R216.2 RJ45.2 U2.16 | length 17.3
  Top Layer w0.254: U2.16 132.897,104.429 133.317,104.849 135.456,104.849 v2(137.795,107.188) R216.2
  Bottom Layer w0.254: RJ45.2 134.162,110.821 v2(137.795,107.188)
pads on no net: +3V3.0 C14.0 C14.1@132.246,83.312 C14.1@133.946,83.312 C15.0 C15.1@135.675,87.63 C15.1@137.375,87.63 C16.0 C16.1@140.45,73.076 C16.1@142.15,73.076 C17.0 C17.1@146.05,86.043 C17.1@146.05,87.743 C18.0 C18.1@129.96,75.311 C18.1@131.66,75.311 C21.0 C21.1@119.927,98.171 C21.1@121.627,98.171 C22.0 C22.1@127.635,104.56 C22.1@127.635,106.26 C23.0 C23.1@130.937,94.146 C23.1@130.937,95.846 C24.0 C24.1@125.343,104.56 C24.1@125.343,106.26 C26.0 C26.1@129.833,104.775 C26.1@131.533,104.775 C27.0 C27.1@132.754,96.012 C27.1@134.454,96.012 C28.0 C28.1@128.905,96.051 C28.1@128.905,97.751 C29.0 C29.1@143.118,111.125 C29.1@144.918,111.125 C31.0 C32.0 C210.0 C210.1@131.572,109.005 C210.1@131.572,110.705 C211.0 C211.1@127.293,117.602 C211.1@128.993,117.602 C212.0 C212.1@143.245,101.092 C212.1@145.045,101.092 D31.0 R21.0 R21.1@139.993,101.092 R21.1@141.693,101.092 R22.0 R22.1@119.927,94.615 R22.1@121.627,94.615 R23.0 R23.1@119.927,96.393 R23.1@121.627,96.393 R24.0 R24.1@119.927,99.925 R24.1@121.627,99.925 R28.0 R28.1@119.927,103.434 R28.1@121.627,103.434 R29.0 R29.1@119.927,101.68 R29.1@119.927,101.679 R29.1@121.627,101.68 R29.1@121.627,101.679 R210.0 R210.1@129.54,107.481 R210.1@129.54,109.181 R211.0 R211.1@131.191,107.481 R211.1@131.191,109.181 R219.0 R219.1@143.097,118.429 R219.1@144.797,118.429 R220.0 R220.1@143.097,120.679 R220.1@144.797,120.679 RJ45.H Rled.0 Rled.1@118.237,79.264 Rled.1@118.237,81.264 S1.3 S1.4 U2.8 U2.9 U2.10 U2.11 U2.12 U2.33 U3.4 U11.2 U11.3 U11.4 U11.8 U11.20 U11.21 U11.22 U11.28 U11.35 U11.44 U11.45 U11.50 U11.55 U11.56 U11.57 U11.58 U11.59 U11.62

## Keep-outs
Keep-Out Layer:
  the board outline again, w0.2

## Other copper
Top Layer:
  pour cut-out: 121.92,119.38 132.08,119.38 139.7,119.38 139.7,101.6 121.92,101.6

## Silkscreen, mask and mechanical layers (free items; w line width, h text height)
Top Overlay:
  lines w0.127: 131.222,74.504 131.247,74.479 144.647,74.479 144.647,87.929 131.222,87.929 131.222,74.504
  text "ARM" at 141.249,79.527 h2.5 r180
  text "Ethernet" at 118.947,75.679 h2.03
  text "TX" at 134.239,70.104 h2.03 r90
  text "RX" at 136.652,70.104 h2.03 r90
  text "GND" at 139.319,69.977 h2.03 r90
  text "5V" at 142.875,67.564 h2.03

## Text inside footprints (layer, text, board x,y; h text height)
C25: Top Overlay "+" at 118.809,110.104 h1.02 r90